# Altium PCB SensWear-V1R2-Debug.PcbDoc (part 2 of 3)
Units mm, origin at the board's own origin, x right, y up, seen from the top; angles counter-clockwise.
Board outline 25 x 25 mm, 4 copper layers (Top, L2, L3, Bottom), stack 1.582 mm thick; 73 components, 63 nets, 295 pads, 106 vias.
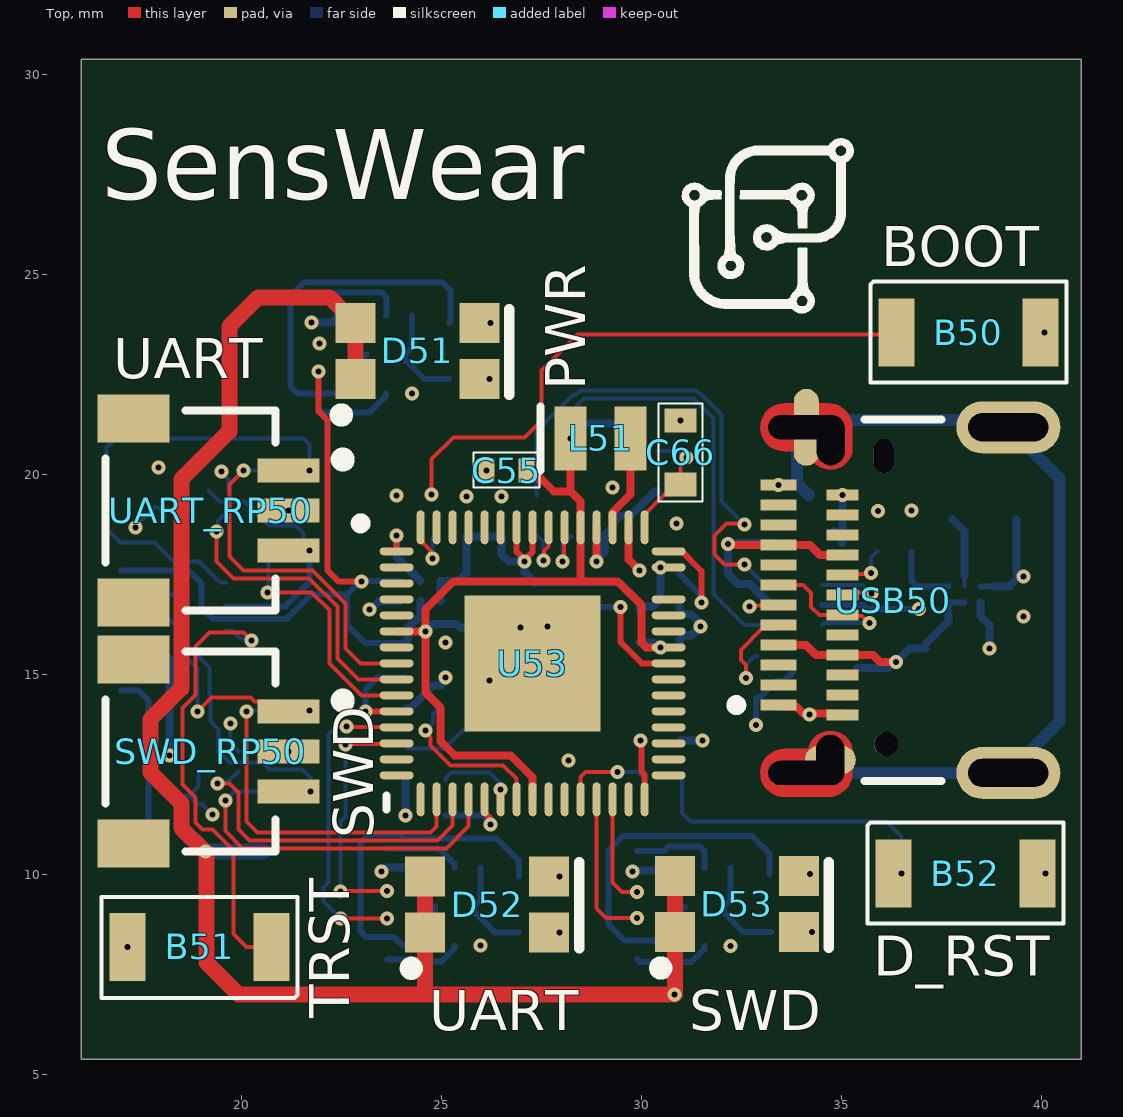
[diagram p0: Top view]

## Part data (continued)
R55: library part ERJ-2RKF2673X, "Res Thick Film 0402 267K Ohm 1% 1/10W ±100ppm/°C Molded SMD Punched Carrier T/R", Case Code (Imperial)=0402, Manufacturer=Panasonic, Manufacturer Lifecycle Status=ACTIVE, Max Operating Temperature=155°C, Max Power Dissipation=100mW, Min Operating Temperature=-55°C, Ratings=AEC-Q200, Supplier Part Number=ERJ2RKF2673X, Temperature Coefficient=100ppm/°C, Tolerance=1%, Voltage Rating=50V, Case/Package=0402, Category="Chip SMD Resistors", China RoHS=Non-Compliant, ComponentLink1Description=https://datasheet.octopart.com:443/ERJ-2RKF2673X-Panasonic-datasheet-82288794.pdf?src-supplier=Panasonic, ComponentLink1URL=https://datasheet.octopart.com:443/ERJ-2RKF2673X-Panasonic-datasheet-82288794.pdf?src-supplier=Panasonic, ComponentLink2Description=https://datasheet.octopart.com:443/ERJ-2RKF2673X-Panasonic-datasheet-48891056.pdf?src-supplier=Newark, ComponentLink2URL=https://datasheet.octopart.com:443/ERJ-2RKF2673X-Panasonic-datasheet-48891056.pdf?src-supplier=Newark, ComponentLink3Description=https://datasheet.octopart.com:443/ERJ-2RKF2673X-Panasonic-datasheet-13266541.pdf?src-supplier=Newark, ComponentLink3URL=https://datasheet.octopart.com:443/ERJ-2RKF2673X-Panasonic-datasheet-13266541.pdf?src-supplier=Newark, ComponentLink4Description=https://datasheet.octopart.com:443/ERJ-2RKF2673X-Panasonic-datasheet-33006990.pdf?src-supplier=Newark, ComponentLink4URL=https://datasheet.octopart.com:443/ERJ-2RKF2673X-Panasonic-datasheet-33006990.pdf?src-supplier=Newark, ComponentLink5Description=https://datasheet.octopart.com:443/ERJ-2RKF2673X-Panasonic---ECG-datasheet-21211697.pdf?src-supplier=Newark, ComponentLink5URL=https://datasheet.octopart.com:443/ERJ-2RKF2673X-Panasonic---ECG-datasheet-21211697.pdf?src-supplier=Newark, ComponentLink6Description=https://datasheet.octopart.com:443/ERJ-2RKF2673X-Panasonic-datasheet-136608610.pdf?src-supplier=Farnell, ComponentLink6URL=https://datasheet.octopart.com:443/ERJ-2RKF2673X-Panasonic-datasheet-136608610.pdf?src-supplier=Farnell, ComponentLink7Description=https://datasheet.octopart.com:443/ERJ-2RKF2673X-Panasonic---ECG-datasheet-15994758.pdf?src-supplier=Farnell, ComponentLink7URL=https://datasheet.octopart.com:443/ERJ-2RKF2673X-Panasonic---ECG-datasheet-15994758.pdf?src-supplier=Farnell, ComponentLink8Description=https://datasheet.octopart.com:443/ERJ-2RKF2673X-Panasonic---ECG-datasheet-10025800.pdf?src-supplier=Farnell, ComponentLink8URL=https://datasheet.octopart.com:443/ERJ-2RKF2673X-Panasonic---ECG-datasheet-10025800.pdf?src-supplier=Farnell, ComponentLink9Description=https://datasheet.octopart.com:443/ERJ-2RKF2673X-Panasonic---ECG-datasheet-8853621.pdf?src-supplier=Farnell, ComponentLink9URL=https://datasheet.octopart.com:443/ERJ-2RKF2673X-Panasonic---ECG-datasheet-8853621.pdf?src-supplier=Farnell, ComponentLink10Description=https://datasheet.octopart.com:443/ERJ-2RKF2673X-Panasonic---ECG-datasheet-5313456.pdf?src-supplier=Farnell, ComponentLink10URL=https://datasheet.octopart.com:443/ERJ-2RKF2673X-Panasonic---ECG-datasheet-5313456.pdf?src-supplier=Farnell, ComponentLink11Description=https://datasheet.octopart.com:443/ERJ2RKF2673X-Panasonic-datasheet-164353789.pdf?src-supplier=HQonline, ComponentLink11URL=https://datasheet.octopart.com:443/ERJ2RKF2673X-Panasonic-datasheet-164353789.pdf?src-supplier=HQonline, ComponentLink12Description=https://datasheet.octopart.com:443/ERJ-2RKF2673X-Panasonic-datasheet-154766169.pdf?src-supplier=Master+Electronics, ComponentLink12URL=https://datasheet.octopart.com:443/ERJ-2RKF2673X-Panasonic-datasheet-154766169.pdf?src-supplier=Master+Electronics, ComponentLink13Description=https://datasheet.octopart.com:443/ERJ2RKF2673X-Panasonic-datasheet-188592431.pdf?src-supplier=TME, ComponentLink13URL=https://datasheet.octopart.com:443/ERJ2RKF2673X-Panasonic-datasheet-188592431.pdf?src-supplier=TME, ComponentLink14Description=https://datasheet.octopart.com/ERJ-2RKF2673X-Panasonic-datasheet-78375410.pdf, ComponentLink14URL=https://datasheet.octopart.com/ERJ-2RKF2673X-Panasonic-datasheet-78375410.pdf, ComponentLink15Description=https://datasheet.octopart.com:443/ERJ-2RKF2673X-Panasonic-datasheet-11542829.pdf?src-supplier=Arrow+Electronics, ComponentLink15URL=https://datasheet.octopart.com:443/ERJ-2RKF2673X-Panasonic-datasheet-11542829.pdf?src-supplier=Arrow+Electronics, ComponentLink16Description=https://datasheet.octopart.com:443/ERJ-2RKF2673X-Panasonic-datasheet-118621.pdf?src-supplier=DigiKey, ComponentLink16URL=https://datasheet.octopart.com:443/ERJ-2RKF2673X-Panasonic-datasheet-118621.pdf?src-supplier=DigiKey, ComponentLink17Description=https://datasheet.octopart.com:443/ERJ-2RKF2673X-Panasonic-datasheet-41391857.pdf?src-supplier=Electro+Sonic, ComponentLink17URL=https://datasheet.octopart.com:443/ERJ-2RKF2673X-Panasonic-datasheet-41391857.pdf?src-supplier=Electro+Sonic, Composition="Thick Film", Contact Plating=Tin, Country of Origin="Japan, Mainland China", Depth=500µm, Export Control Classification Number (ECCN) Code=EAR99, Features="Automotive AEC-Q200", Harmonized Tariff Schedule (HTS) Code=8533.21.00.30, Height=350µm, Introduction Date=2004-02-02, Lead Free="Lead Free", Length=1mm, Lifecycle Status=Production, Manufacturer Part Number=ERJ-2RKF2673X, Military Standard=Not, Mounting Technology="Surface Mount", Number of Terminals=2, Number of Terminations=2, Part Series="Precision Thick Film Chip Resistors", Power Dissipation=100mW, Power Rating=100mW, Pricing="10000=0.0035, 40000=0.0034, 150000=0.0033, 250000=0.0032, 500000=0.0031 (USD)", REACH SVHC=Yes, RoHS=Compliant, Schedule B="8533210045, 8533210045|8533210045|8533210045|8533210045|8533210045", Stock=90000, Supplier="Future Electronics", Termination=SMD/SMT, Voltage Rating (DC)=50V, Width=500µm, Working Voltage=50V
R56 R58: library part ERJ-2RKF27R0X, "Res Thick Film 0402 27 Ohm 1% 0.1W ±100ppm/°C Molded SMD Punched Carrier T/R", Case Code (Imperial)=0402, Case Code (Metric)=1005, Manufacturer=Panasonic, Manufacturer Lifecycle Status=ACTIVE, Max Operating Temperature=155°C, Max Power Dissipation=100mW, Min Operating Temperature=-55°C, Ratings=AEC-Q200, Supplier Part Number=ERJ2RKF27R0X, Temperature Coefficient=100ppm/°C, Tolerance=1%, Voltage Rating=50V, Case/Package=0402, Category="Chip SMD Resistors", China RoHS=Non-Compliant, ComponentLink1Description=https://datasheet.octopart.com:443/ERJ-2RKF27R0X-Panasonic-datasheet-82288794.pdf?src-supplier=Panasonic, ComponentLink1URL=https://datasheet.octopart.com:443/ERJ-2RKF27R0X-Panasonic-datasheet-82288794.pdf?src-supplier=Panasonic, ComponentLink2Description=https://datasheet.octopart.com:443/ERJ-2RKF27R0X-Panasonic-datasheet-13266541.pdf?src-supplier=element14+APAC, ComponentLink2URL=https://datasheet.octopart.com:443/ERJ-2RKF27R0X-Panasonic-datasheet-13266541.pdf?src-supplier=element14+APAC, ComponentLink3Description=https://datasheet.octopart.com:443/ERJ2RKF27R0X-Panasonic-datasheet-10025800.pdf?src-supplier=element14+APAC, ComponentLink3URL=https://datasheet.octopart.com:443/ERJ2RKF27R0X-Panasonic-datasheet-10025800.pdf?src-supplier=element14+APAC, ComponentLink4Description=https://datasheet.octopart.com:443/ERJ2RKF27R0X-Panasonic-datasheet-8853621.pdf?src-supplier=element14+APAC, ComponentLink4URL=https://datasheet.octopart.com:443/ERJ2RKF27R0X-Panasonic-datasheet-8853621.pdf?src-supplier=element14+APAC, ComponentLink5Description=https://datasheet.octopart.com:443/ERJ-2RKF27R0X-Panasonic-datasheet-5313456.pdf?src-supplier=element14+APAC, ComponentLink5URL=https://datasheet.octopart.com:443/ERJ-2RKF27R0X-Panasonic-datasheet-5313456.pdf?src-supplier=element14+APAC, ComponentLink6Description=https://datasheet.octopart.com:443/ERJ-2RKF27R0X-Panasonic-datasheet-48891056.pdf?src-supplier=Newark, ComponentLink6URL=https://datasheet.octopart.com:443/ERJ-2RKF27R0X-Panasonic-datasheet-48891056.pdf?src-supplier=Newark, ComponentLink7Description=https://datasheet.octopart.com:443/ERJ-2RKF27R0X.-Panasonic-datasheet-182872238.pdf?src-supplier=Newark, ComponentLink7URL=https://datasheet.octopart.com:443/ERJ-2RKF27R0X.-Panasonic-datasheet-182872238.pdf?src-supplier=Newark, ComponentLink8Description=https://datasheet.octopart.com:443/ERJ-2RKF27R0X-Panasonic-datasheet-154766169.pdf?src-supplier=JRH+Electronics, ComponentLink8URL=https://datasheet.octopart.com:443/ERJ-2RKF27R0X-Panasonic-datasheet-154766169.pdf?src-supplier=JRH+Electronics, ComponentLink9Description=https://datasheet.octopart.com:443/ERJ-2RKF27R0X-Panasonic-datasheet-136608610.pdf?src-supplier=Farnell, ComponentLink9URL=https://datasheet.octopart.com:443/ERJ-2RKF27R0X-Panasonic-datasheet-136608610.pdf?src-supplier=Farnell, ComponentLink10Description=https://datasheet.octopart.com:443/ERJ2RKF27R0X-Panasonic-datasheet-164353789.pdf?src-supplier=HQonline, ComponentLink10URL=https://datasheet.octopart.com:443/ERJ2RKF27R0X-Panasonic-datasheet-164353789.pdf?src-supplier=HQonline, ComponentLink11Description=https://datasheet.octopart.com:443/ERJ2RKF27R0X-Panasonic-datasheet-188592431.pdf?src-supplier=TME, ComponentLink11URL=https://datasheet.octopart.com:443/ERJ2RKF27R0X-Panasonic-datasheet-188592431.pdf?src-supplier=TME, ComponentLink12Description=https://datasheet.octopart.com/ERJ-2RKF27R0X-Panasonic-datasheet-78375410.pdf, ComponentLink12URL=https://datasheet.octopart.com/ERJ-2RKF27R0X-Panasonic-datasheet-78375410.pdf, ComponentLink13Description=https://datasheet.octopart.com:443/ERJ2RKF27R0X-Panasonic-datasheet-11784922.pdf?src-supplier=Arrow+Electronics, ComponentLink13URL=https://datasheet.octopart.com:443/ERJ2RKF27R0X-Panasonic-datasheet-11784922.pdf?src-supplier=Arrow+Electronics, ComponentLink14Description=https://datasheet.octopart.com:443/ERJ-2RKF27R0X-Panasonic-datasheet-41391857.pdf?src-supplier=Electro+Sonic, ComponentLink14URL=https://datasheet.octopart.com:443/ERJ-2RKF27R0X-Panasonic-datasheet-41391857.pdf?src-supplier=Electro+Sonic, Composition="Thick Film", Contact Plating=Tin, Depth=500µm, Features="Automotive AEC-Q200", Height=350µm, Lead Free="Lead Free", Length=1mm, Lifecycle Status=Production, Manufacturer Part Number=ERJ-2RKF27R0X, Military Standard=Not, Mounting Technology="Surface Mount", Number of Terminals=2, Number of Terminations=2, Packaging="Cut Tape", Part Series="Precision Thick Film Chip Resistors", Pins=2, Power Dissipation=100mW, Power Rating=100mW, Pricing="10=0.0163, 100=0.0124, 500=0.0086, 2500=0.0077, 5000=0.0058 (EUR)", Radiation Hardening=No, REACH SVHC=Yes, RoHS=Compliant, Schedule B="8533210045, 8533210045|8533210045|8533210045|8533210045|8533210045", Stock=52991, Supplier=Farnell, Termination=SMD/SMT, Voltage Rating (DC)=50V, Weight=793.786648µg, Width=500µm, Working Voltage=50V
R57: library part ERJ-2RKF33R0X, "RES SMD 33 OHM 1% 1/10W 0402", Case Code (Imperial)=0402, Case Code (Metric)=1005, Manufacturer=Panasonic, Max Operating Temperature=155°C, Max Power Dissipation=100mW, Min Operating Temperature=-55°C, Package Quantity=1, Resistance Tolerance=1%, Resistor Type="Thick Film", Supplier Part Number=667-ERJ-2RKF33R0X, Temperature Coefficient=100ppm/°C, Voltage Rating=50V, Case/Package=0402, Category="Chip SMD Resistors", ComponentLink1Description=https://datasheet.ciiva.com/11821/0900766b80f80784-11821292.pdf?src-supplier=Rs, ComponentLink1URL=https://datasheet.ciiva.com/11821/0900766b80f80784-11821292.pdf?src-supplier=Rs, ComponentLink2Description=https://datasheet.ciiva.com/5917/aoa0000ce2-5917817.pdf?src-supplier=Farnell, ComponentLink2URL=https://datasheet.ciiva.com/5917/aoa0000ce2-5917817.pdf?src-supplier=Farnell, ComponentLink3Description=https://datasheet.ciiva.com/7836/aoa0000ce2-7836490.pdf?src-supplier=Element14, ComponentLink3URL=https://datasheet.ciiva.com/7836/aoa0000ce2-7836490.pdf?src-supplier=Element14, ComponentLink4Description=https://datasheet.ciiva.com/7836/426256-7836813.pdf?src-supplier=Element14, ComponentLink4URL=https://datasheet.ciiva.com/7836/426256-7836813.pdf?src-supplier=Element14, ComponentLink5Description=https://datasheet.ciiva.com/43467/1678782-43467173.pdf?src-supplier=Farnell, ComponentLink5URL=https://datasheet.ciiva.com/43467/1678782-43467173.pdf?src-supplier=Farnell, ComponentLink6Description=https://datasheet.ciiva.com/46373/1678782-46373081.pdf?src-supplier=Element14, ComponentLink6URL=https://datasheet.ciiva.com/46373/1678782-46373081.pdf?src-supplier=Element14, ComponentLink7Description=https://datasheet.ciiva.com/46373/1678782-46373082.pdf?src-supplier=Element14, ComponentLink7URL=https://datasheet.ciiva.com/46373/1678782-46373082.pdf?src-supplier=Element14, ComponentLink8Description=https://datasheet.ciiva.com/24023/aoa0000ce2-24023999.pdf?src-supplier=Mouser, ComponentLink8URL=https://datasheet.ciiva.com/24023/aoa0000ce2-24023999.pdf?src-supplier=Mouser, ComponentLink9Description=https://datasheet.ciiva.com/16777/70260748-16777705.pdf?src-supplier=Allied+Electronics, ComponentLink9URL=https://datasheet.ciiva.com/16777/70260748-16777705.pdf?src-supplier=Allied+Electronics, ComponentLink10Description=https://datasheet.ciiva.com/9190/aoa0000ce2-9190507.pdf?src-supplier=Avnet, ComponentLink10URL=https://datasheet.ciiva.com/9190/aoa0000ce2-9190507.pdf?src-supplier=Avnet, Construction=Rectangular, Contact Plating=Tin, Depth=0.5mm, Features="Automotive AEC-Q200", Height=0.35mm, Lead Free="Lead Free", Length=1mm, Manufacturer Part Number=ERJ-2RKF33R0X, Military Standard=Not, Mounting Technology="Surface Mount", Number of Terminations=2, Packaging="Tape and Reel", Pins=2, Power Rating=100mW, Pricing="1=0,1, 10=0,017, 50=0,017, 100=0,008, 1000=0,006, 10000=0,004 (USD)", Reach SVHC Compliant=No, RoHS=Yes, RoHS Compliant=Yes, Series=ERJ, Stock=1156222, Supplier=Mouser, Supplier 1=Mouser, Supplier Part Number 1=667-ERJ-2RKF33R0X, Technology="THICK FILM", Termination=SMD/SMT, Tolerance=1%, Voltage Rating (DC)=50V, Width=0.5mm